# Altium PCB nRF24L01-Module.PcbDoc
Units mil, origin at the board's own origin, x right, y up, seen from the top; angles counter-clockwise.
Board outline 1290 x 1305 mil, 2 copper layers (Top Layer, Bottom Layer); 13 components, 14 nets, 85 pads, 4 vias.
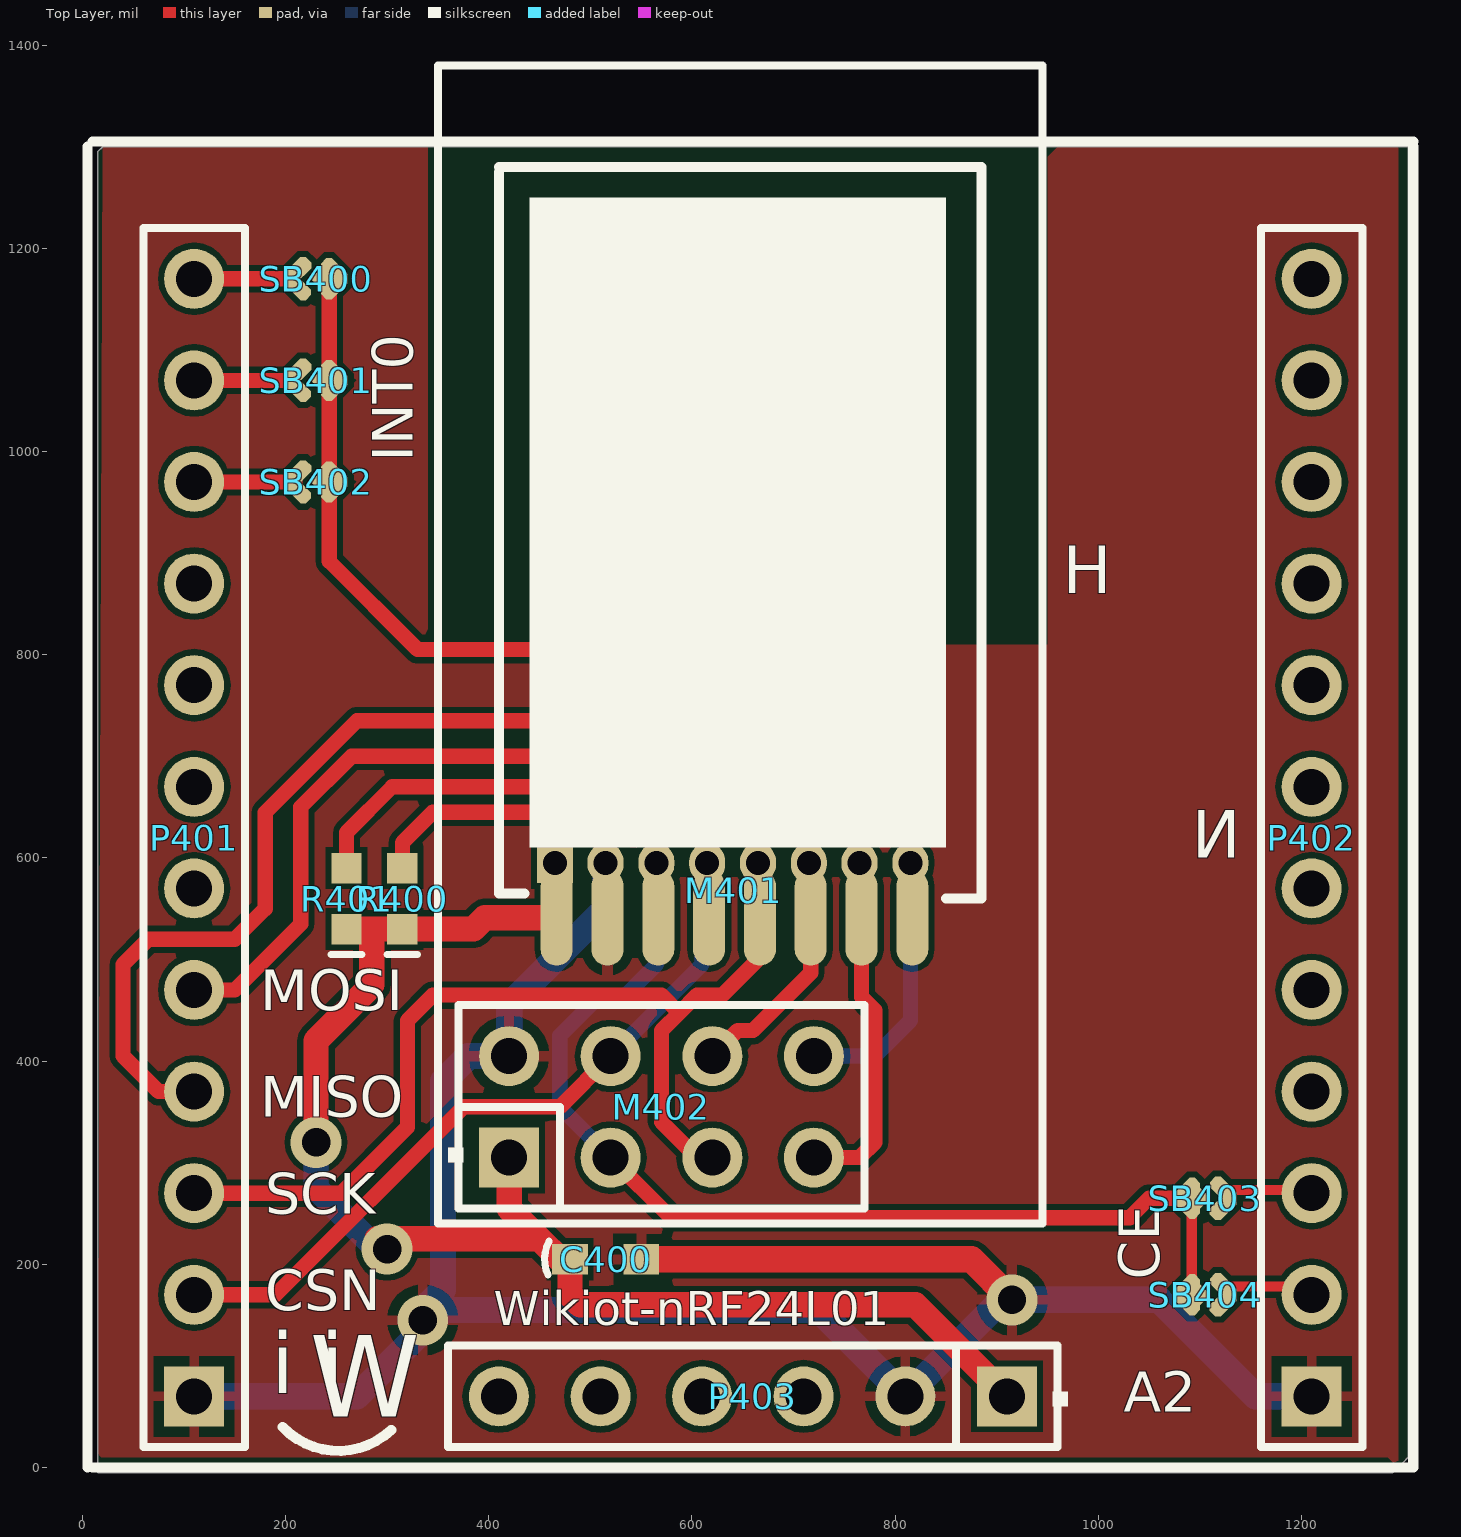
[diagram p0: Top Layer view]
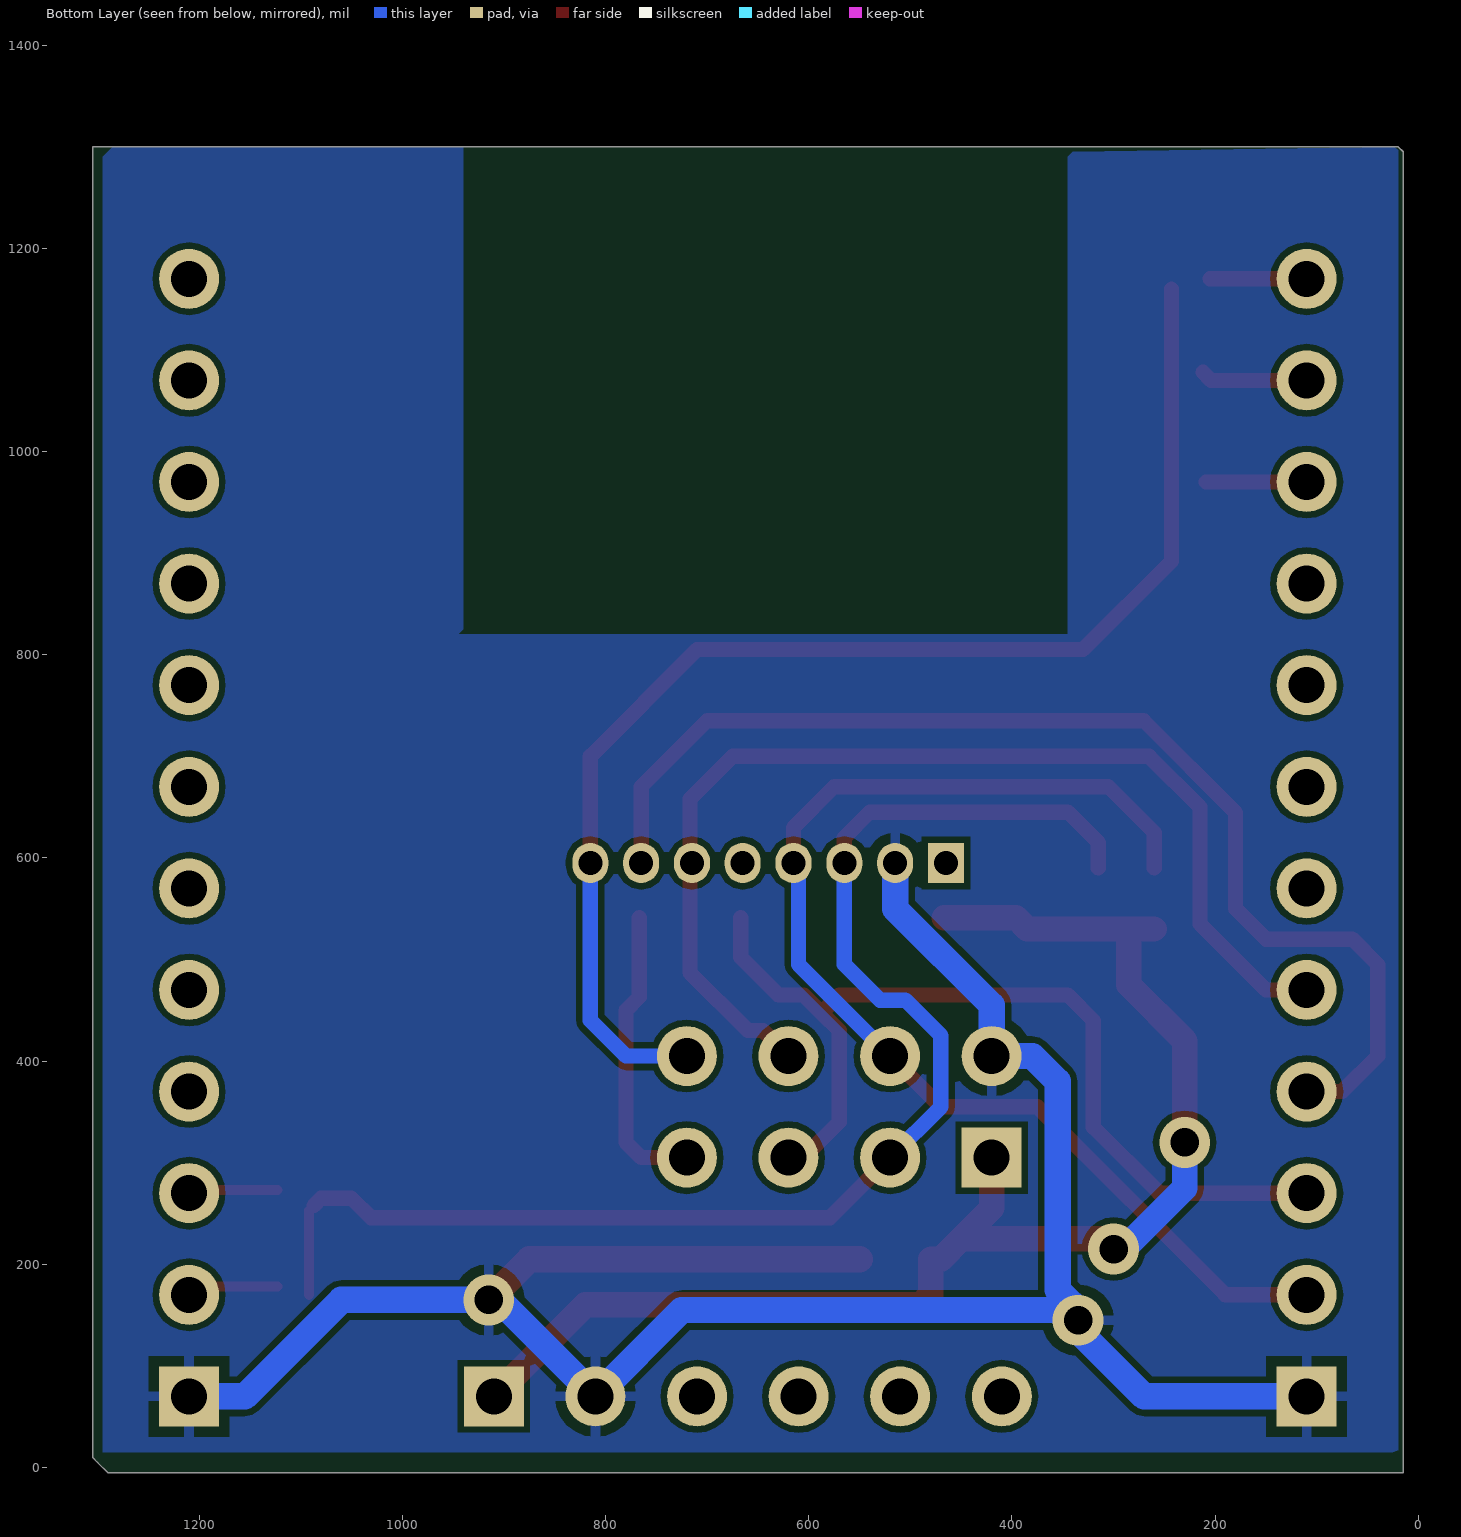
[diagram p1: Bottom Layer view, seen from below]

## Layer stack, top to bottom
Top Solder: solder mask 0.4, Solder Resist, Dk 3.5
Top Layer: signal copper 1.4
Dielectric1: dielectric 12.6, FR-4, Dk 4.8
Bottom Layer: signal copper 1.4
Bottom Solder: solder mask 0.4, Solder Resist, Dk 3.5

## Board outline
15,1295 20,1300 1305,1300 1305,10 1300,5 1290,-5 15,-5

## Design rules (kind name [scope] priority, off if disabled: settings)
Clearance [All] p1: gap=6
PolygonConnect [All] p1: connectstyle=Relief reliefconductorwidth=10 reliefentries=4 polygonreliefangle="90 Angle" airgapwidth=10
RoomDefinition nRF24L01-Module [InComponentClass('nRF24L01-Module')] p1: confinementstyle=ConfineIn formatcopy=TRUE lockcomponents=FALSE outline 15,0 1315,0 1315,1430 15,1430
RoutingVias [All] p1: holewidth=12 width=25 viastyle="Through Hole" minholewidth=12 minwidth=25 maxholewidth=28 maxwidth=50
SolderMaskExpansion [All] p1: expansion=4
UnpouredPolygon [All] p1: allowunpoured=FALSE
Width [All] p1: maxlimit=55 minlimit=7 preferedwidth=10
29 further rules are at their usual default settings.

## Components (designator, comment, footprint, x,y, rotation, side; value= is the part's Value field where it differs from the comment)
C400 "0.1uF" C0603L 515,205 r0 top
M401 "nRF24L01-Mini" nRF24L01-Mini-All 465,560 r90 top
M402 "nRF24L01-Mini" nRF24L01-DIP 350,240 r270 top
P401 "Synio Header-L 12-Pin" HDR1X12 110,70 r90 top
P402 "Synio Header-R 12-Pin" HDR1X12 1210,70 r90 top
P403 "Synio Power Header 6 Pin" HDR1X6/2.54MM 910,70 r180 top
R400 "1K" R0603 315,560 r90 top
R401 "1K" R0603 260,560 r90 top
SB400 "Circuit Breaker" JP2_SMD 230,1170 r0 top
SB401 "Circuit Breaker" JP2_SMD 230,1070 r0 top
SB402 "Circuit Breaker" JP2_SMD 230,970 r0 top
SB403 "Circuit Breaker" JP2_SMD 1105,265 r180 top
SB404 "Circuit Breaker" JP2_SMD 1105,170 r180 top

## Footprints (in the part's own frame and the unit in brackets; to place one, negate y for a bottom-side part, rotate by r counter-clockwise, add the part's x,y. Pads: shape width x height; smd on the part's side, far side on the other; paste and mask are expansions set on the pad)
C0603L [mil]
  rect 35x30 smd: 1(-35,0) 2(35,0)
  silkscreen extent -60,-16 -56,18, body extent -31,-16 32,15, height 24
HDR1X6/2.54MM [mm] "Connector; Header; 6 Position"
  rect 1.5x1.5 hole 0.9: 1(0,0)
  round 1.5 hole 0.9: 2(2.54,0) 3(5.08,0) 4(7.62,0) 5(10.16,0) 6(12.7,0)
  silkscreen extent -1.52,-1.27 13.97,1.27
HDR1X12 [mm] "Connector; Header; 12 Position"
  rect 1.5x1.5 hole 0.9: 1(0,0)
  round 1.5 hole 0.9: 2(2.54,0) 3(5.08,0) 4(7.62,0) 5(10.16,0) 6(12.7,0) 7(15.24,0) 8(17.78,0) 9(20.32,0) 10(22.86,0) 11(25.4,0) 12(27.94,0)
  silkscreen extent -1.27,-1.27 29.21,1.27
JP2_SMD [mil]
  oct 15x30 smd rot 45: 1(-18,-8) 2(18,7)
  oct 15.75x30 smd rot 135: 1(-18,8)
  rect 26x26 smd rot 45: 2(13,0)
  oct 15x30 smd rot 135: 2(18,-7)
nRF24L01-DIP [mm] "Connector; Header; 4x2 Position"
  rect 1.5x1.5 hole 0.9: 1(-1.651,1.778)
  round 1.5 hole 0.9: 2(-4.191,1.778) 3(-1.651,4.318) 4(-4.191,4.318) 5(-1.651,6.858) 6(-4.191,6.858) 7(-1.651,9.398) 8(-4.191,9.398)
  silkscreen extent -28.96,0 0,15.11
nRF24L01-Mini-All [mm]
  oval 2.4x0.8 smd: 1(-0.477,-0.048) 2(-0.477,-1.318) 3(-0.477,-2.588) 4(-0.477,-3.858) 5(-0.477,-5.128) 6(-0.477,-6.398) 7(-0.477,-7.668) 8(-0.477,-8.938)
  rect 1x0.9 hole 0.6: 1(0.889,0)
  oval 1x0.9 hole 0.6: 2(0.889,-1.27) 3(0.889,-2.54) 4(0.889,-3.81) 5(0.889,-5.08) 6(0.889,-6.35) 7(0.889,-7.62) 8(0.889,-8.89)
  silkscreen extent 0,-10.67 18.29,1.4
R0603 [mil]
  rect 30x30 smd: 1(-30,0) 2(30,0)
  silkscreen extent -55,-15 -55,15, body extent -31,-16 32,15, height 18

## Part data
C400: library part Cap, "Capacitor"
P401: "Synio Header-L, 12-Pin"
P402: "Synio Header-R, 12-Pin"
R400 R401: library part Res, "Resistor"

## Via types
v1: diameter 50, hole 28, Top Layer to Bottom Layer, 4 vias

## Nets (pads, with @x,y where several pads share a name; then routed paths per layer and width w, separated by ;. In a path a pad name is that pad's centre, name@x,y a point inside that pad or via, vN(x,y) a via of type N, cw(c..) or ccw(c..) an arc to the next point about the centre after c; other vN are vias at no path point)
CE: M401.3 M402.3 R400.2 SB403.2 SB404.2 | length 1399.9
  Top Layer w10: SB403.2@1087,258 1092,253 SB404.2@1092,170
  Top Layer w15: R400.2 315,615 345,645 540,645 565,620 M401.3@565,595 ; M402.3 579.12,245.88 1030.88,245.88 1050,265 ; 1070,265 1050,265 ; SB403.2@1087,258 1080,265 1050,265
  Bottom Layer w15: M402.3 470,355 470,425 505,460 530,460 565,495 M401.3@565,595
CSN: M401.4 M402.4 P401.2 R401.2 | length 1196.9
  Top Layer w15: P401.2 190,170 375,355 470,355 M402.4 ; R401.2 260,625 305,670 575,670 615,630 M401.4@615,595
  Bottom Layer w15: M402.4 610,495 610,590 M401.4@615,595
D3V3: C400.1 M401.1 M402.1 P403.1 R400.1 R401.1 | length 1395.4
  Top Layer w25: v1(230,320) 230,420 285,475 285,530 ; R401.1 285,530 ; v1(300,215) 290,225 450,225 ; M402.1 420,255 450,225 ; M401.1@466.89,541.23 396.23,541.23 385,530 R400.1 285,530 ; P403.1 820,160 665,160 490,160 480,170 C400.1 470,205 450,225
  Bottom Layer w25: v1(230,320) 230,275 290,215 v1(300,215)
GND: C400.2 M401.2 M402.2 P401.1 P402.1 P403.2 | length 2220.7
  Top Layer w26: v1(335,145) v1@335,155 ; C400.2 875,205 v1(915,165)
  Bottom Layer w26: P401.1 270,70 v1@330,130 ; M401.2@515,595 515,550 420,455 M402.2 380,405 355,380 355,175 330,150 v1@330,130 ; v1@930,165 v1(915,165) ; P402.1 1155,70 1060,165 v1(915,165) ; v1@330,130 355,155 725,155 P403.2 905,165 v1(915,165)
INT0: M401.8 M402.8 SB400.2 SB401.2 SB402.2 | length 1289
  Top Layer w15: SB400.2@243,1160 243,1070 243,892 330,805 710,805 815,700 M401.8@815,595
  Bottom Layer w15: M402.8 780,405 815,440 M401.8@815,595
MISO: M401.7 M402.7 P401.4 | length 1449.2
  Top Layer w15: P401.4 75,370 40,405 40,495 65,520 150,520 180,550 180,644.7 270.3,735 700,735 765,670 M401.7@765,595 ; M402.7 765,305 780,320 780,450 766.89,463.11 M401.7@766.89,541.23
MOSI: M401.6 M402.6 P401.5 | length 1088.9
  Top Layer w15: P401.5 150,470 215,535 215,650 265,700 675,700 716.89,658.11 716.89,541.23 716.89,486.89 660,430 645,430 M402.6
NetP401_10: P401.10 SB402.1 | length 99
  Top Layer w15: P401.10 SB402.1@209,970
NetP401_11: P401.11 SB401.1 | length 105.3
  Top Layer w15: P401.11 204,1070 SB401.1@212,1078
NetP401_12: P401.12 SB400.1 | length 95
  Top Layer w15: P401.12 SB400.1@205,1170
NetP402_2: P402.2 SB404.1 | length 90.3
  Top Layer w10: SB404.1@1123,178 1202,178 P402.2
NetP402_3: P402.3 SB403.1 | length 88.2
  Top Layer w10: SB403.1@1123,273 1207,273 P402.3
NRST: P403.5
SCK: M401.5 M402.5 P401.3 | length 947.5
  Top Layer w15: P401.3 255,270 320,335 320,440 345,465 570,465 587.5,447.5 ; M402.5 605,305 570,340 570,430 587.5,447.5 ; M401.5@666.89,541.23 666.89,501.89 630,465 605,465 587.5,447.5
pads on no net: P401.6 P401.7 P401.8 P401.9 P402.4 P402.5 P402.6 P402.7 P402.8 P402.9 P402.10 P402.11 P402.12 P403.3 P403.4 P403.6

## Polygon pours and split planes (outlines as drawn)
GND on Top Layer "Top Layer-No Net" (solid, remove dead copper, pour order 6): 20,1300 340,1300 340,825 345,820 355,810 950,810 950,1290 960,1300 1295,1300 1295,0 1285,10 15,10
GND on Bottom Layer "Top Layer-No Net" (solid, remove dead copper, pour order 8): 20,1300 20,10 25,15 1295,15 1295,1290 1290,1295 1285,1300 940,1300 940,825 945,820 345,820 345,1290 340,1295

## Silkscreen, mask and mechanical layers (free items; w line width, h text height)
Top Overlay:
  lines w10: 5,0 5,1300 ; 10,0 1310,0 1310,1300 ; 10,1305 1310,1305 ; 197,40 ccw(c252,92) 304,37
  text "INT0" at 325,990 h40 r90
  text "H" at 965,845 h80
  text "N" at 1140,585 h80
  text "MOSI" at 175,450 h40
  text "MISO" at 175,345 h40
  text "SCK" at 180,250 h40
  text "CE" at 1060,185 h40 r90
  text "CSN" at 180,155 h40
  text "Wikiot-nRF24L01" at 405,140 h33.46
  text "i i" at 186,73 h60
  text "A2" at 1025,55 h39.37
  text "W" at 224,50 h80